# Altium PCB finalPCB.pcbdoc
Units mil, origin at the board's own origin, x right, y up, seen from the top; angles counter-clockwise.
Board outline 2545 x 1765 mil, 2 copper layers (Top Layer, Bottom Layer); 33 components, 15 nets, 80 pads, 0 vias.
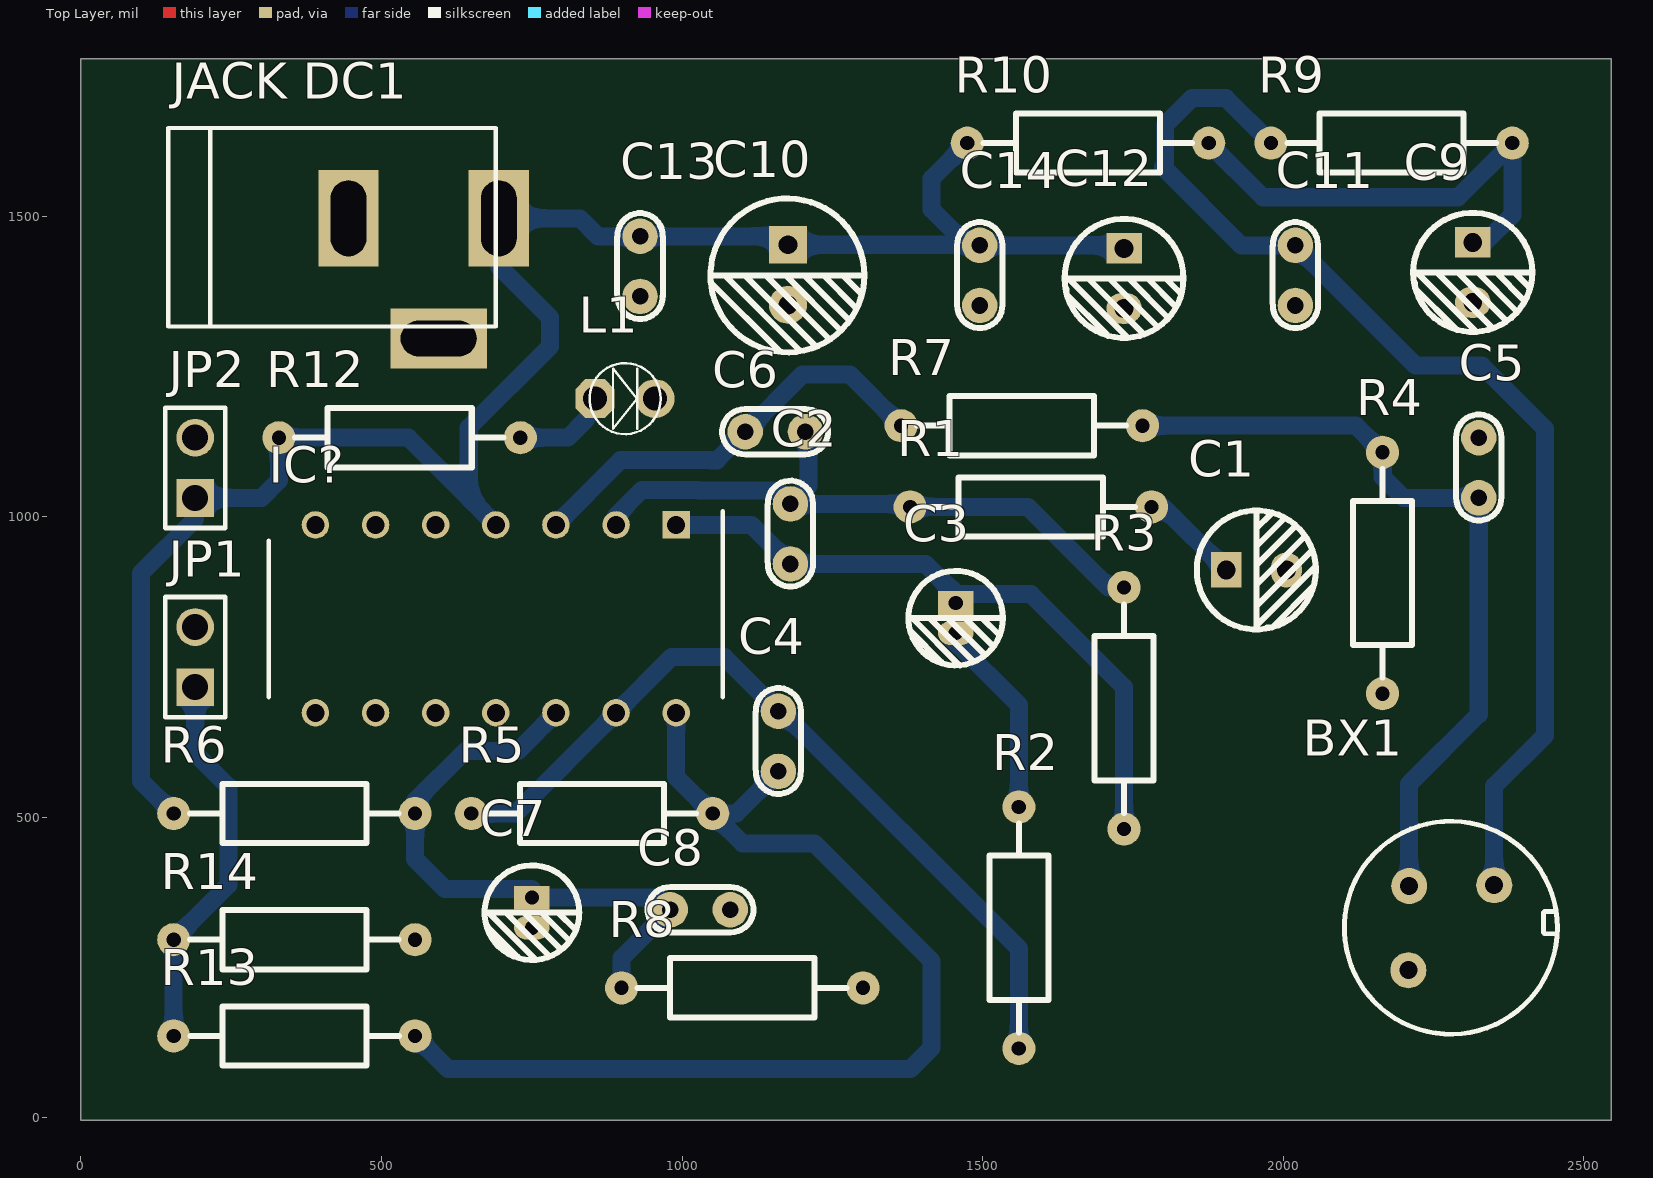
[diagram p0: Top Layer view]
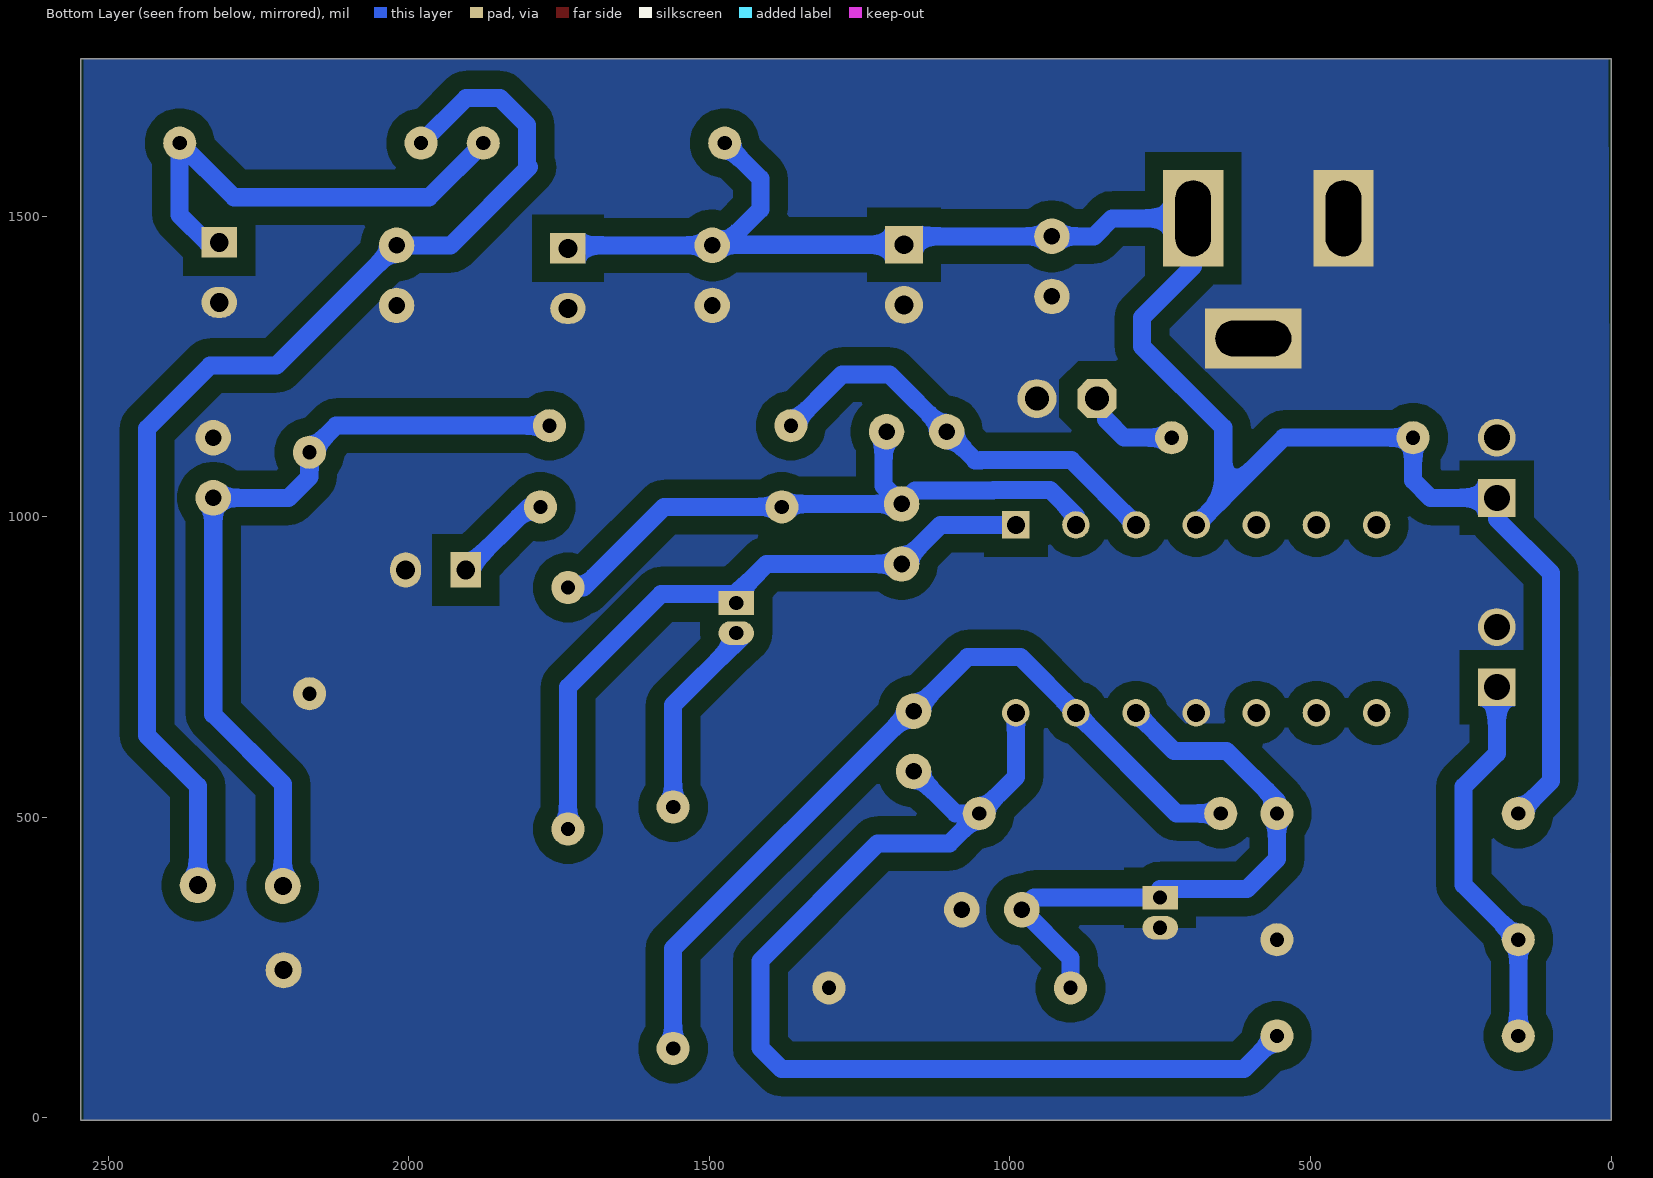
[diagram p1: Bottom Layer view, seen from below]
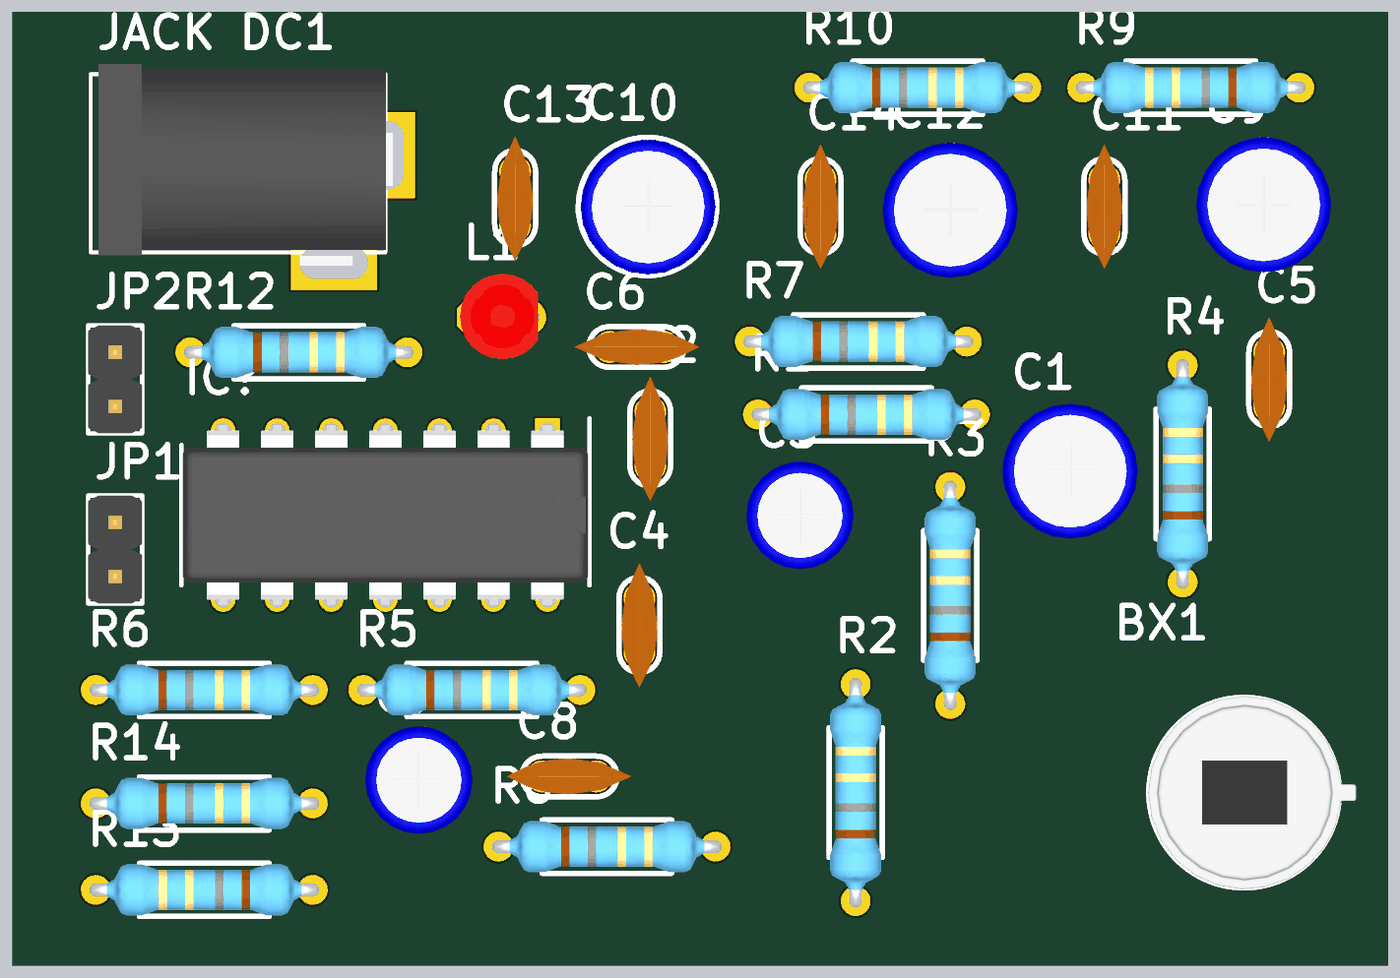
[diagram p2: 3D render of the assembled board from above, using the file's embedded part models]

## Layer stack, top to bottom
Top Solder: solder mask 0.4, Solder Resist, Dk 3.5
Top Layer: signal copper 1.4
Dielectric 1: dielectric 12.6, FR-4, Dk 4.8
Bottom Layer: signal copper 1.4
Bottom Solder: solder mask 0.4, Solder Resist, Dk 3.5

## Board outline
-0.01,-3.54 2544.99,-3.54 2544.99,1761.46 -0.01,1761.46

## Design rules (kind name [scope] priority, off if disabled: settings)
Clearance [All] p1: gap=30 ignorepadtopadclearanceinfootprint=FALSE
PolygonConnect [All] p1: connectstyle=Direct reliefconductorwidth=10 reliefentries=4 polygonreliefangle="90 Angle" airgapwidth=10
RoutingVias [All] p1: holewidth=30 width=80 viastyle="Through Hole" minholewidth=30 minwidth=80 maxholewidth=30 maxwidth=80
SolderMaskExpansion [All] p1: expansion=4 istentingtop=FALSE
Width [All] p1: maxlimit=30 minlimit=20 preferedwidth=30
30 further rules are at their usual default settings.

## Components (designator, comment, footprint, x,y, rotation, side; value= is the part's Value field where it differs from the comment)
BX1 "PIR D203S" BXR315A 2279.99,316.46 r225 top
C1 "47uF" "tu hoa 5mm" 1954.99,911.46 r0 top
C2 "103" "tu gom" 1179.99,971.46 r270 top
C3 "10uF" "tu hoa 4mm" 1454.99,831.46 r270 top
C4 "103" "tu gom" 1159.99,626.46 r270 top
C5 "104" "tu gom" 2324.99,1081.46 r270 top
C6 "103" "tu gom" 1154.99,1141.46 r0 top
C7 "10uF" "tu hoa 4mm" 749.99,341.46 r270 top
C8 "103" "tu gom" 1029.99,346.46 r180 top
C9 "100uF" "tu hoa 5mm" 2314.99,1406.46 r270 top
C10 "220uF" "tu hoa 6.5mm" 1174.99,1401.46 r270 top
C11 "104" "tu gom" 2019.99,1401.46 r270 top
C12 "100uF" "tu hoa 5mm" 1734.99,1396.46 r270 top
C13 "104" "tu gom" 929.99,1416.46 r270 top
C14 "104" "tu gom" 1494.99,1401.46 r270 top
IC? "LM324N_NOPB" DIP794W56P254L1905H533Q14N 689.99,830.2 r270 top
"JACK DC1" "JACK DC 5.5" "JACK DC 5.5" 569.99,1396.46 r0 top value="Jac DC"
JP1 "JP 1x2 2.54" "JP 1x2 DT" 189.99,716.46 r90 top
JP2 "JP 1x2 2.54" "JP 1x2 DT" 189.99,1031.46 r90 top
L1 "LED 3mm" LED-3MM-RED 854.99,1196.46 r0 top
R1 "47k" "tro vach 1/4w" 1579.99,1016.46 r180 top
R2 "15k" "tro vach 1/4w" 1559.99,316.46 r270 top
R3 "1M" "tro vach 1/4w" 1734.99,681.46 r270 top
R4 "120k" "tro vach 1/4w" 2164.99,906.46 r270 top
R5 "2M7" "tro vach 1/4w" 849.99,506.46 r180 top
R6 "150k" "Tro vach 1/4w" 354.99,506.46 r180 top
R7 "120k" "tro vach 1/4w" 1564.99,1151.46 r180 top
R8 "100K" "tro vach 1/4w" 1099.99,216.46 r180 top
R9 "10k" "tro vach 1/4w" 2179.99,1621.46 r0 top
R10 "10k" "tro vach 1/4w" 1674.99,1621.46 r180 top
R12 "150k" "Tro vach 1/4w" 529.99,1131.46 r180 top
R13 "2M7" "tro vach 1/4w" 354.99,136.46 r0 top
R14 "2M7" "tro vach 1/4w" 354.99,296.46 r180 top

## Footprints (in the part's own frame and the unit in brackets; to place one, negate y for a bottom-side part, rotate by r counter-clockwise, add the part's x,y. Pads: shape width x height; smd on the part's side, far side on the other; paste and mask are expansions set on the pad)
BXR315A [mil] "Xtal for RF"
  round 60 hole 30: 1(-100,0) 2(1,-99) 3(101,-1)
  silkscreen extent -176,-178 178,176, body extent -179,-179 179,179, height 187
DIP794W56P254L1905H533Q14N [mil]
  rect 45.63x45.63 hole 29.88: 1(-156.26,300)
  round 45.63 hole 29.88: 2(-156.26,200) 3(-156.26,100) 4(-156.26,0) 5(-156.26,-100) 6(-156.26,-200) 7(-156.26,-300) 8(156.26,-300) 9(156.26,-200) 10(156.26,-100) 11(156.26,0) 12(156.26,100) 13(156.26,200) 14(156.26,300)
  silkscreen extent -179,-377 130,377, body extent -167,-375 167,375, height 172
"JACK DC 5.5" [mil] "Jac DC input"
  rect 100x160 hole 59.06 slot 125.98 at 90 deg: 1(125,100) 2(-125,100)
  rect 160x100 hole 59.06 slot 125.98 at 0 deg: 3(25,-100)
  silkscreen extent -425,-80 120,250, body extent -410,-105 134,269, height 434
"JP 1x2 DT" [mm] "2 pins, 1 row, straight, gold plating"
  rect 1.6x1.6 hole 1.1: 1(0,0)
  round 1.6 hole 1.1: 2(2.54,0)
  silkscreen extent -1.27,-1.27 3.81,1.27, body extent -1.27,-1.27 3.81,1.27, height 8.54
LED-3MM-RED [mil]
  oct 65x65 hole 40: 1(0,0)
  round 65 hole 40: 2(100,0)
  silkscreen extent -9,-59 109,59, body extent -27,-77 117,80, height 181
"tro vach 1/4w" [mm]
  round 1.4 hole 0.6: 1(-5.1,0) 2(5.1,0)
  silkscreen extent -4.39,-1.25 4.42,1.25, body extent -5.38,-1.2 5.38,1.2, height 2.41
"Tro vach 1/4w" [mm]
  round 1.4 hole 0.6: 1(-5.1,0) 2(5.1,0)
  silkscreen extent -4.39,-1.25 4.42,1.25, body extent -5.38,-1.2 5.38,1.2, height 2.41
"tu gom" [mm] "Tu gom mini"
  round 1.5 hole 0.7: 1(-1.27,0) 2(1.27,0)
  silkscreen extent -2.25,-0.97 2.22,0.97, body extent -2.92,-0.85 2.92,0.85, height 6.12
"tu hoa 4mm" [mm]
  rect 1x1.5 hole 0.6: 1(-0.635,0)
  oval 1x1.5 hole 0.6: 2(0.635,0)
  silkscreen extent -2,-2 2.01,2.01, body extent -2.47,-2.47 2.58,2.58, height 14.81
"tu hoa 5mm" [mm]
  rect 1.3x1.5 hole 0.8: 1(-1.27,0)
  oval 1.3x1.5 hole 0.8: 2(1.27,0)
  silkscreen extent -2.51,-2.51 2.51,2.51, body extent -3.12,-3.18 3.23,3.18, height 14.55
"tu hoa 6.5mm" [mm]
  rect 1.6x1.6 hole 0.8: 1(-1.295,0.025)
  round 1.6 hole 0.8: 2(1.245,0.025)
  silkscreen extent -3.25,-3.25 3.25,3.25, body extent -3.15,-3.15 3.2,3.2, height 14.55

## Part data
C1: library part "Tu Hoa 47uF 16V 5x10", "C?m", Chung_Loai=C?m, Don_Vi=Con, Ma_Hang=MH006859, So_Chan=2, Ten_Linh_Kien="T? Hóa 47uF 16V"
C2 C4 C6 C8: library part "Tu gom 103 50V", "C?m", Chung_Loai=C?m, Don_Vi=Con, Ma_Hang=MH000936, So_Chan=2, Ten_Linh_Kien="T? g?m 103 10nF 50V"
C3 C7: library part "Tu Hoa 10uF 16V 4x7", "C?m", Chung_Loai=C?m, Don_Vi=Con, Ma_Hang=MH006855, So_Chan=2, Ten_Linh_Kien="T? Hóa 10uF 16V"
C5 C11 C13 C14: library part "Tu gom 104 50V", "C?m", Chung_Loai=C?m, Don_Vi=Con, Ma_Hang=MH004761, So_Chan=2, Ten_Linh_Kien="T? g?m 104 100nF 50V"
C9 C12: library part "Tu Hoa 100uF 16V 5x11", "C?m", Chung_Loai=C?m, Don_Vi=Con, Ma_Hang=MH008417, So_Chan=2, Ten_Linh_Kien="T? Hóa 100uF 16V 5x11MM"
C10: library part "Tu Hoa 220uF 16V 7x11", "C?m", Chung_Loai=C?m, Don_Vi=Con, Ma_Hang=MH008416, So_Chan=2, Ten_Linh_Kien="T? Hóa 220uF 16V 7x11MM"
IC?: "Integrated Circuit", Arrow Part Number=LM324N/NOPB, Manufacturer_Name="Texas Instruments", Mouser Part Number=926-LM324N/NOPB, Arrow Price/Stock=https://www.arrow.com/en/products/lm324nnopb/texas-instruments?region=nac, Datasheet Link=http://www.ti.com/general/docs/lit/getliterature.tsp?genericPartNumber=LM324-N&fileType=pdf&HQS=ti-null-null-sf-df-pf-sep-wwe&DCM=yes, Height=5.334mm, Manufacturer_Part_Number=LM324N/NOPB, Mouser Price/Stock=https://www.mouser.co.uk/ProductDetail/Texas-Instruments/LM324N-NOPB?qs=X1J7HmVL2ZGOUbLumEeh2Q%3D%3D
JP1 JP2: library part "JP 1x2 2.54 Duc Thang", "C?m", Chung_Loai=C?m, Don_Vi=Con, Ma_Hang=MH000903, Ten_Linh_Kien="Jump Ðon Ð?c 2.54MM 1x40P Th?ng 11MM"
L1: library part "LED 3mm Do", "C?m", Chung_Loai=C?m, Don_Vi=Con, Ma_Hang=MH003892, Ten_Linh_Kien="Led 3MM Ph? Ð? (10c)"
R1 R2 R3 R4 R5 R7 R8 R9 R10 R13 R14: library part "Tro Vach 1/4W 1%  120k", "C?m", Chung_Loai=C?m, Don_Vi=Con, Ma_Hang=MH008833, So_Chan=2, Ten_Linh_Kien="Tr? V?ch 1/4W 1% 120k"
R6 R12: library part "Tro Vach 1/4W 5% 150k", "C?m", Chung_Loai=C?m, Don_Vi=Con, Ma_Hang=MH007286, So_Chan=2, Ten_Linh_Kien="Tr? V?ch 1/4w 5% 150k"

## Nets (pads, with @x,y where several pads share a name; then routed paths per layer and width w, separated by ;. In a path a pad name is that pad's centre, name@x,y a point inside that pad or via, vN(x,y) a via of type N, cw(c..) or ccw(c..) an arc to the next point about the centre after c; other vN are vias at no path point)
+5V: "JACK DC1.1" C10.1 C12.1 C13.1 C14.1 IC?.4 JP2.1 R6.2 R10.2 R12.2 | length 3062.5
  Bottom Layer w30: R6.2 99.99,560.67 99.99,906.46 189.99,996.46 JP2.1 299.99,1031.46 329.2,1060.67 R12.2 544.99,1131.46 644.99,1031.46 ; IC?.4 644.99,1031.46 ; R10.2 1414.99,1562.25 1414.99,1511.46 C14.1@1473.99,1452.46 ; C12.1 1729.99,1451.46 C14.1 1474.99,1451.46 C14.1@1473.99,1452.46 ; 644.99,1031.46 644.99,1148.29 779.99,1283.29 779.99,1331.46 694.99,1416.46 694.99,1496.46 829.99,1496.46 859.99,1466.46 C13.1 1161.99,1466.46 C10.1 C14.1@1473.99,1452.46
Drain: BX1.1 C11.1 R9.1 | length 1906.4
  Bottom Layer w30: R9.1 1904.2,1696.46 1848.16,1696.46 1803.22,1651.51 1803.22,1584.69 1799.99,1581.46 1929.99,1451.46 C11.1 2219.99,1251.46 2329.99,1251.46 2434.99,1146.46 2434.99,636.46 2350.7,552.17 BX1.1
GROUND: "JACK DC1.2" "JACK DC1.3" BX1.3 C1.2 C5.1 C7.2 C8.1 C9.2 C10.2 C11.2 C12.2 C13.2 C14.2 IC?.11 JP1.2 JP2.2 L1.2 R4.2 R8.1 R14.1
NetC1_1: C1.1 R1.1 | length 167.7
  Bottom Layer w30: R1.1 1799.99,1016.46 C1.1
NetC2_1: C2.1 C6.2 IC?.2 R1.2 R3.1 | length 1079.3
  Bottom Layer w30: IC?.2 889.99,1001.46 932.81,1044.27 1027.3,1044.27 1027.62,1043.96 1157.49,1043.96 C2.1 ; C6.2 1209.99,1136.46 1209.99,1051.46 C2.1 ; R3.1 1709.2,882.25 1574.99,1016.46 R1.2 1374.2,1021.46 C2.1
NetC2_2: C2.2 C3.1 IC?.1 R3.2 | length 1092.6
  Bottom Layer w30: IC?.1 1114.99,986.46 C2.2 1404.67,921.46 1454.99,871.14 1580.31,871.14 1734.99,716.46 R3.2
NetC3_2: C3.2 R2.1 | length 318
  Bottom Layer w30: C3.2@1454.99,791.77 1559.99,686.77 R2.1
NetC4_1: C4.1 IC?.13 R2.2 R5.2 | length 1385.4
  Bottom Layer w30: R5.2 722.51,506.46 IC?.13 982.51,766.46 1069.99,766.46 C4.1 1165.39,676.46 1559.99,281.86 R2.2
NetC6_1: C6.1 IC?.3 R7.2 | length 713.2
  Bottom Layer w30: IC?.3 897.81,1094.27 1048.01,1094.27 1048.33,1093.96 1057.49,1093.96 C6.1 1199.99,1236.46 1279.2,1236.46 R7.2
NetC7_1: C7.1 C8.2 IC?.12 R6.1 R8.2 | length 1008
  Bottom Layer w30: C7.1 959.99,366.46 C8.2 899.2,265.67 R8.2 ; C7.1@749.99,381.14 605.31,381.14 555.78,430.67 R6.1 555.78,527.25 639.2,610.67 726.72,610.67 IC?.12
NetC9_1: C9.1 R9.2 R10.1 | length 783.5
  Bottom Layer w30: R10.1 1965.78,1531.46 2290.78,1531.46 R9.2 2380.78,1502.25 2334.99,1456.46 C9.1
NetL1_1: L1.1 R12.1 | length 121.6
  Bottom Layer w30: R12.1 809.99,1131.46 839.99,1161.46
OUTPUT: JP1.1 R13.1 R14.2 | length 640.4
  Bottom Layer w30: R13.1 R14.2 244.99,387.25 244.99,551.46 189.99,606.46 JP1.1
OUTPUT1: C4.2 IC?.14 R5.1 R13.2 | length 1838.1
  Bottom Layer w30: R13.2 610.78,81.46 1379.99,81.46 1414.99,116.46 1414.99,261.46 1219.99,456.46 1100.78,456.46 R5.1 ; IC?.14 989.99,567.25 R5.1 ; C4.2 1089.99,506.46 R5.1
Source: BX1.2 C5.2 R4.1 R7.1 | length 1326.4
  Bottom Layer w30: R7.1 2120.78,1151.46 R4.1 2164.99,1066.46 2199.99,1031.46 C5.2 2324.99,671.46 2209.28,555.75 BX1.2
pads on no net: IC?.5 IC?.6 IC?.7 IC?.8 IC?.9 IC?.10

## Polygon pours and split planes (outlines as drawn)
GROUND on Bottom Layer "Bottom Layer-GROUND" (solid, remove dead copper, pour order 36): 4.99,1761.46 2539.99,1761.46 2539.99,-3.54 -0.01,-3.54